# EAGLE board kyesh (EAGLE 7.5.0)
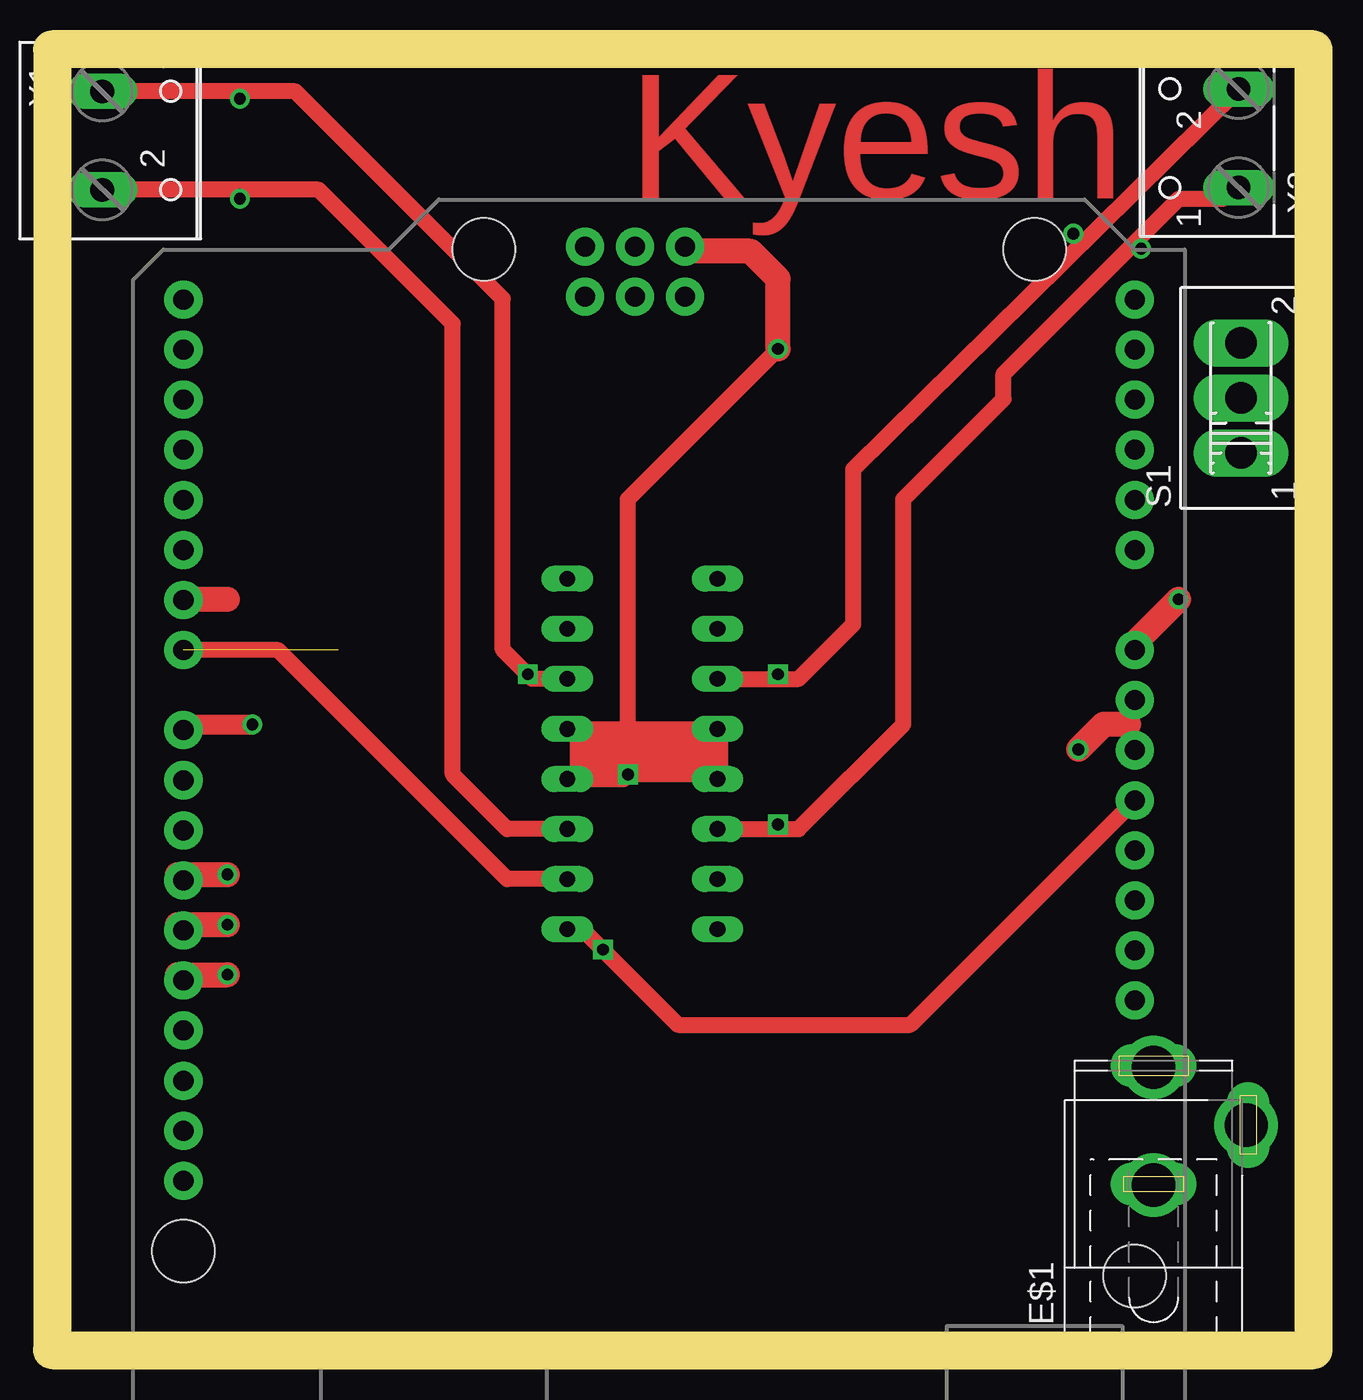
[diagram p0: board, top side]
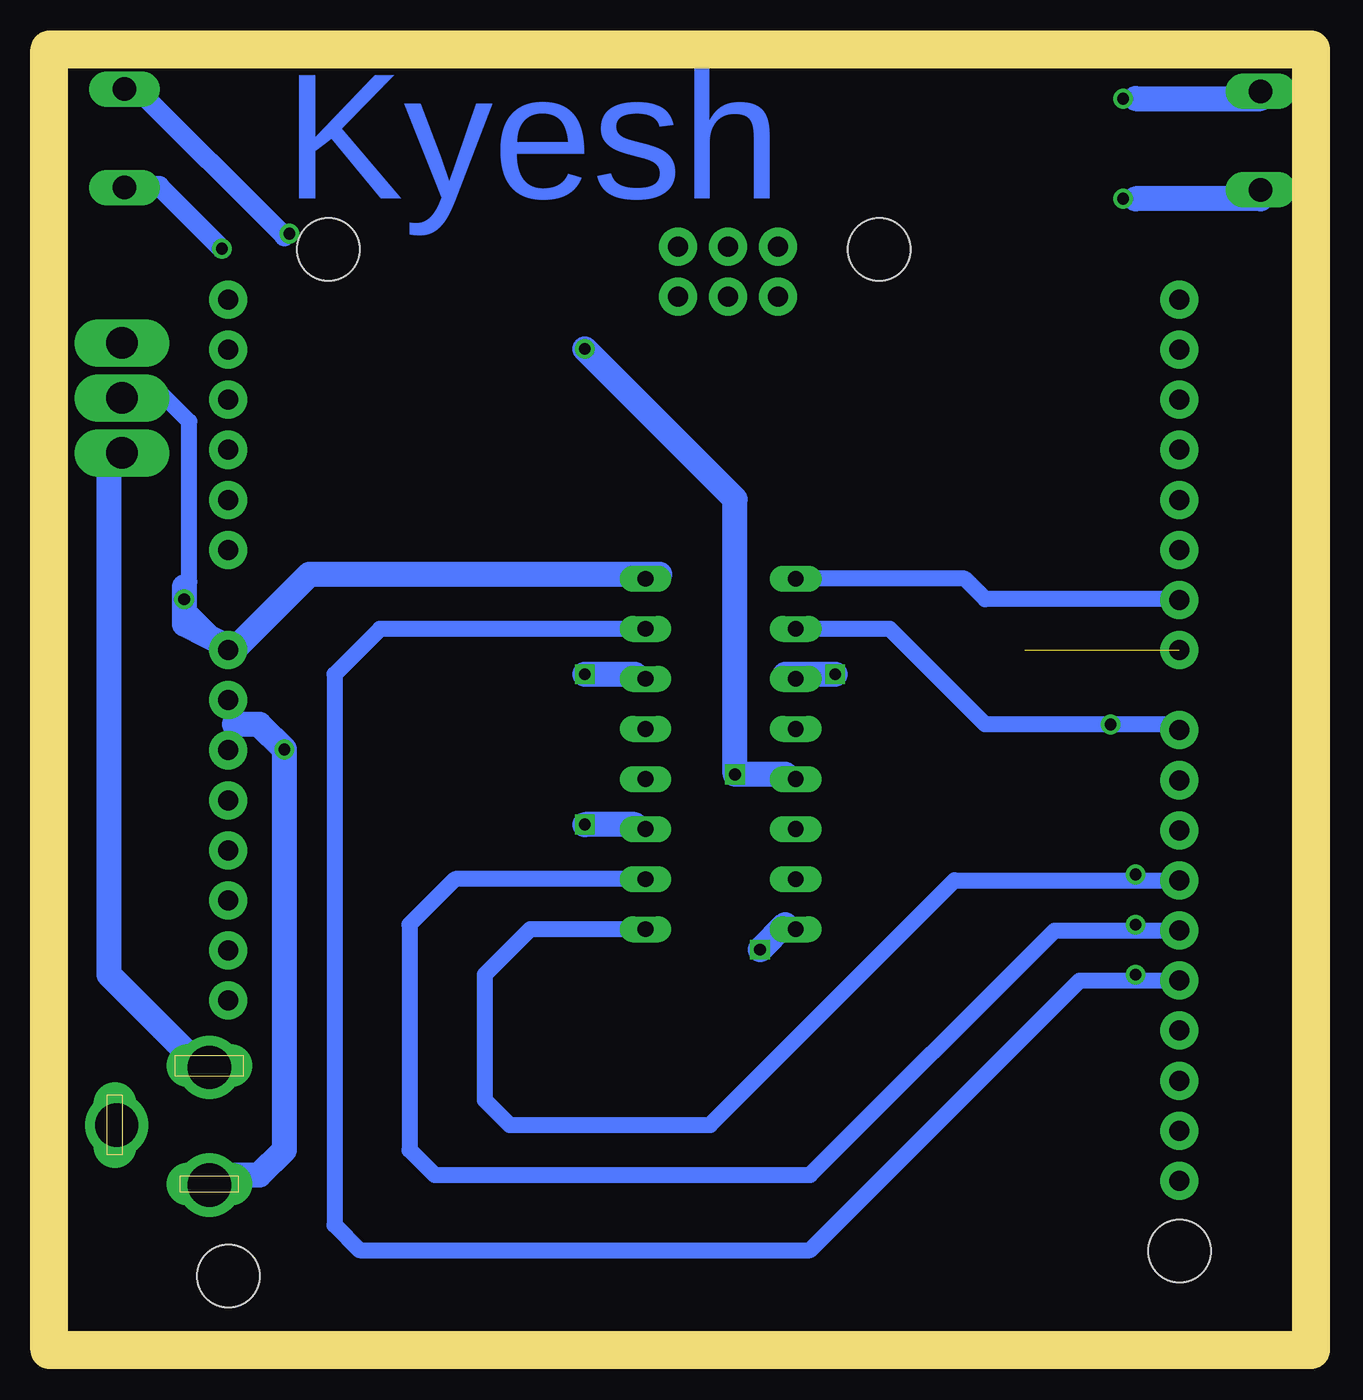
[diagram p1: board, bottom side, seen from below]

Size 64 x 66 mm. Coordinates in mm from the lower left corner, seen from the top.
Outline: 0,0 64,0 64,66 0,66 0,0
Copper layers (1*16): Top 0.035mm / dielectric 1.5mm / Bottom 0.035mm
Design rules "default": minimum track width 10mil, minimum drill 24mil, track to track 8mil, track to pad 8mil, pad to pad 8mil, via to via 8mil, smd to smd 8mil, copper to edge 40mil, drill to drill 8mil, minimum pad ring 10mil, minimum via ring 8mil, stop-mask expansion 4mil, vias tented up to drill 0mil, thermal gap 10mil

## Footprints (pad centres in the part's own frame; a part is rotated, then mirrored left to right if it is on the bottom)
5.5-2.5-BARRELCONNECTOR = drill 0.8 pad 2.184 long: 1 -3,0; 2 0,-4.8 | drill 1 pad 2.184 long: 3 3,0 | drill 2.2: P$1 -3.048,0; P$2 2.921,0; P$3 0,-4.699
DIP16 = drill 0.8 long: P1 -8.89,-3.81; P2 -6.35,-3.81; P3 -3.81,-3.81; P4 -1.27,-3.81; P5 1.27,-3.81; P6 3.81,-3.81; P7 6.35,-3.81; P8 8.89,-3.81; P9 8.89,3.81; P10 6.35,3.81; P11 3.81,3.81; P12 1.27,3.81; P13 -1.27,3.81; P14 -3.81,3.81; P15 -6.35,3.81; P16 -8.89,3.81
ARDUINO_R3 = drill 1.016 pad 1.93: 3.3V 35.56,2.54; 5V 38.1,2.54; A0 50.8,2.54; A1 53.34,2.54; A2 55.88,2.54; A3 58.42,2.54; A4 60.96,2.54; A5 63.5,2.54; AREF 23.876,50.8; D0 63.5,50.8; D1 60.96,50.8; D2 58.42,50.8; D3 55.88,50.8; D4 53.34,50.8; D5 50.8,50.8; D6 48.26,50.8; D7 45.72,50.8; D8 41.656,50.8; D9 39.116,50.8; D10 36.576,50.8; D11 34.036,50.8; D12 31.496,50.8; D13 28.956,50.8; GND@1 40.64,2.54; GND@2 43.18,2.54; GND@3 26.416,50.8; GND@4 66.18,25.35; IOREF 30.48,2.54; MISO 63.64,30.43; MOSI 66.18,27.89; NC 27.94,2.54; RESET@1 33.02,2.54; RESET@2 63.64,25.35; SCK 63.64,27.89; SCL 18.796,50.8; SDA 21.336,50.8; VCC 66.18,30.43; VIN 45.72,2.54 | hole 3.175: 15.24,50.8; 66.04,35.56; 66.04,7.62; 13.97,2.54
SLIDE_SWITCH = drill 1.6 long: 1 -2.794,0; 2 0,0; 3 2.794,0
2PIN-SCREW-TERMINAL = drill 1.194 long: 1 -2.5,-1.27; 2 2.5,-1.27

## Placement (x,y rotation side)
E$1  [5.5-2.5-BARRELCONNECTOR]  55.88,11.43 90 top
ENABLE  MOTOR_DRIVERDIP16  [DIP16]  29.94,30.25 90 top
J1  ARDUINO_UNO_R3  [ARDUINO_R3]  57.46,-10.2 90 top
S1  [SLIDE_SWITCH]  60.31,48.31 90 top
X1  [2PIN-SCREW-TERMINAL]  3.81,61.37 270 top
X2  [2PIN-SCREW-TERMINAL]  58.92,61.49 90 top

## Library data of the parts
E$1 ENABLE J1 S1 = ISCTRainingProgram
X1 X2 = ISCTRainingProgram; MPN: 237-102; OC_FARNELL: unknown; OC_NEWARK: 70K9898

## Nets
ENABLE: ENABLE.P1 J1.D11
GND: ENABLE.P4 ENABLE.P5 ENABLE.P12
N$1: ENABLE.P3 X2.1
N$2: ENABLE.P13 J1.GND@4
N$3: ENABLE.P16 J1.5V
N$4: ENABLE.P8 J1.VIN
N$5: ENABLE.P6 X2.2
N$6: ENABLE.P11 X1.1
N$7: ENABLE.P14 X1.2
N$8: ENABLE.P10 J1.D8
N$9: ENABLE.P2 J1.D12
N$10: ENABLE.P7 J1.D13
N$11: ENABLE.P9 J1.D6
N$12: ENABLE.P15 J1.D7
S$15: S1.2

## Tracks (layer width: path | path; a pad name or v marks a point on that pad's centre or on a via)
ENABLE
  Bottom 0.813: ENABLE.P1 39.6,21.36 41.91,19.05 41.91,12.7 40.64,11.43 30.48,11.43 18.07,23.84 J1.D11
GND
  Top 0.813: ENABLE.P12 ENABLE.P5 ENABLE.P4
N$1
  Top 0.813: ENABLE.P3 37.87,26.44 43.18,31.75 43.18,43.18 48.26,48.26 48.26,49.53 57.15,58.42 59.37,58.42 X2.1
N$2  (via drill 0.6)
  Top 0.813: ENABLE.P13 28.98,28.98 v29.21,29.21 29.21,43.18 v36.83,50.8 36.83,54.61 35.46,55.98 J1.GND@4
  Top 1.27: v36.83,50.8 36.83,54.36 35.43,55.75 32.13,55.75 32,55.88
  Bottom 1.27: 26.67,29.21 v29.21,29.21 29.21,43.18 v36.83,50.8
N$3  (via drill 0.6)
  Top 0.813: ENABLE.P16 26.9,21.36 v27.94,20.32 31.75,16.51 43.53,16.51 J1.5V
  Bottom 1.27: 26.67,21.59 v27.94,20.32
N$4  (via drill 0.6)
  Top 1.27: 54.61,35.56 v57.15,38.1
  Bottom 0.813: 57.15,36.83 57.15,37.75 J1.VIN 51.3,39.14 ENABLE.P8
  Bottom 1.27: 57.15,38.73 v57.15,38.1 57.15,36.83 54.61,35.56 50.8,39.37 33.02,39.37
N$5
  Top 0.813: ENABLE.P6 37.87,34.06 40.64,36.83 40.64,44.69 X2.2
N$6  (via drill 0.6)
  Top 0.813: ENABLE.P11 24.36,34.06 v24.13,34.29 22.86,35.56 22.86,53.34 12.33,63.87 X1.1
  Bottom 1.27: v24.13,34.29 26.67,34.29
N$7
  Top 0.813: X1.2 13.52,58.87 20.32,52.07 20.32,29.21 23.09,26.44 ENABLE.P14
N$8  (via drill 0.6)
  Top 1.016: 6.35,31.75 v10.16,31.75
  Bottom 0.813: J1.D8 6.95,31.75 v10.16,31.75 16.51,31.75 21.36,36.6 ENABLE.P10
N$9
  Bottom 0.813: ENABLE.P2 43.41,23.9 45.72,21.59 45.72,10.16 44.45,8.89 25.4,8.89 12.99,21.3 J1.D12
N$10
  Bottom 0.813: ENABLE.P7 47.22,36.6 49.53,34.29 49.53,6.35 48.26,5.08 25.4,5.08 11.72,18.76 J1.D13
N$11
  Bottom 0.813: J1.D6 6.7,38.1 16.51,38.1 17.55,39.14 ENABLE.P9
N$12  (1 unrouted)
  Top 0.813: ENABLE.P15 23.09,23.9 11.47,35.52 J1.D7
N$13  (via drill 0.6)
  Bottom 1.27: 34.29,26.67 v36.83,26.67
N$14  (via drill 0.6)
  Bottom 1.27: 34.29,34.29 v36.83,34.29
N$21
  Top 0.813: 33.02,29.21 26.67,29.21 26.67,31.75
S$1
  Bottom 1.27: 55.88,13.97 60.96,19.05 60.96,45.72
S$2  (via drill 0.6)
  Top 1.27: 54.61,31.75 53.34,31.75 v52.07,30.48
  Bottom 1.27: 55.88,8.89 53.34,8.89 52.07,10.16 v52.07,30.48 53.34,31.75 54.61,31.75
S$3
  Top 1.27: 6.35,38.1 8.89,38.1
S$4  (via drill 0.6)
  Top 1.27: 6.35,24.13 v8.89,24.13
S$5  (via drill 0.6)
  Top 1.27: 6.35,21.59 v8.89,21.59
S$6  (via drill 0.6)
  Top 1.27: 6.35,19.05 v8.89,19.05
S$7  (via drill 0.6)
  other vias: 51.82,56.64
S$8  (via drill 0.6)
  Bottom 1.016: v55.24,55.88 58.42,59.05 59.05,59.05
S$9  (via drill 0.6)
  other vias: 9.53,63.5
S$10  (via drill 0.6)
  other vias: 9.53,58.42
S$11
  Bottom 1.27: 2.54,58.42 8.89,58.42
S$12
  Bottom 1.27: 8.89,63.5 2.54,63.5
S$13
  Bottom 1.016: 52.07,56.52 59.69,64.14
S$14
  Bottom 0.813: 56.9,38.99 56.9,47.12 58.42,48.64
S$15
  Bottom 0.813: 59.74,48.31 S1.2
(copper drawn outside any net)
  shapes: Top area x1

## Text on the board
Top: Kyesh
Bottom: Kyesh